# Altium PCB Top.PcbDoc
Units mm, origin at the board's own origin, x right, y up, seen from the top; angles counter-clockwise.
Board outline 98 x 45 mm, 2 copper layers (Top Layer, Bottom Layer); 45 components, 29 nets, 170 pads, 26 vias.
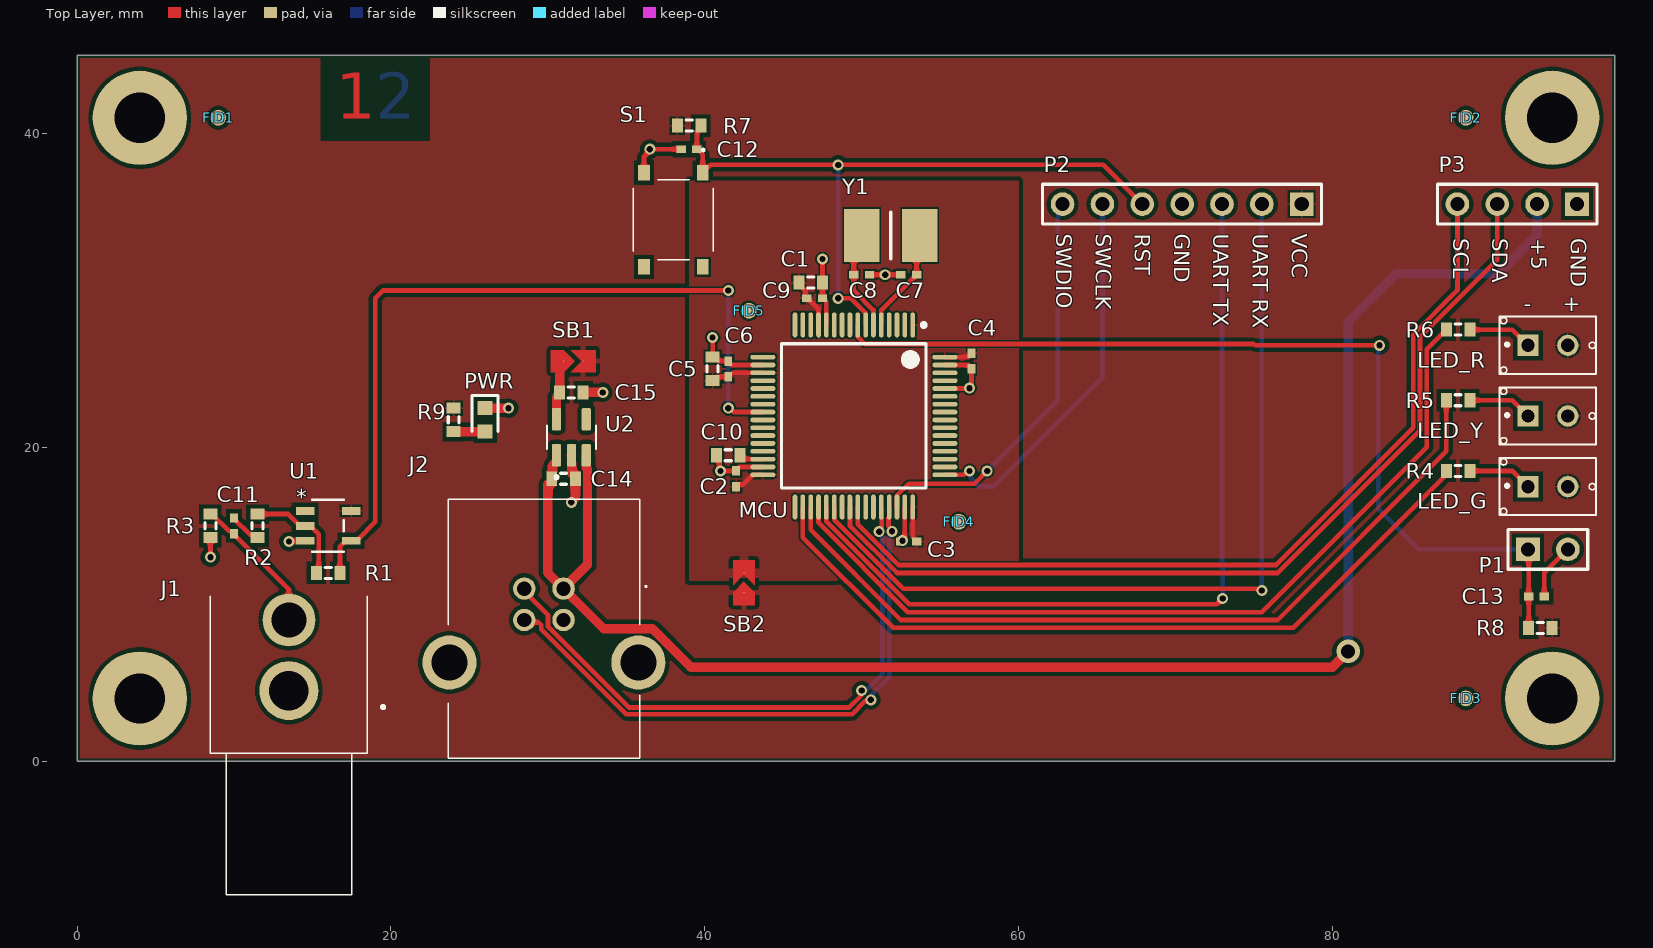
[diagram p0: Top Layer view]
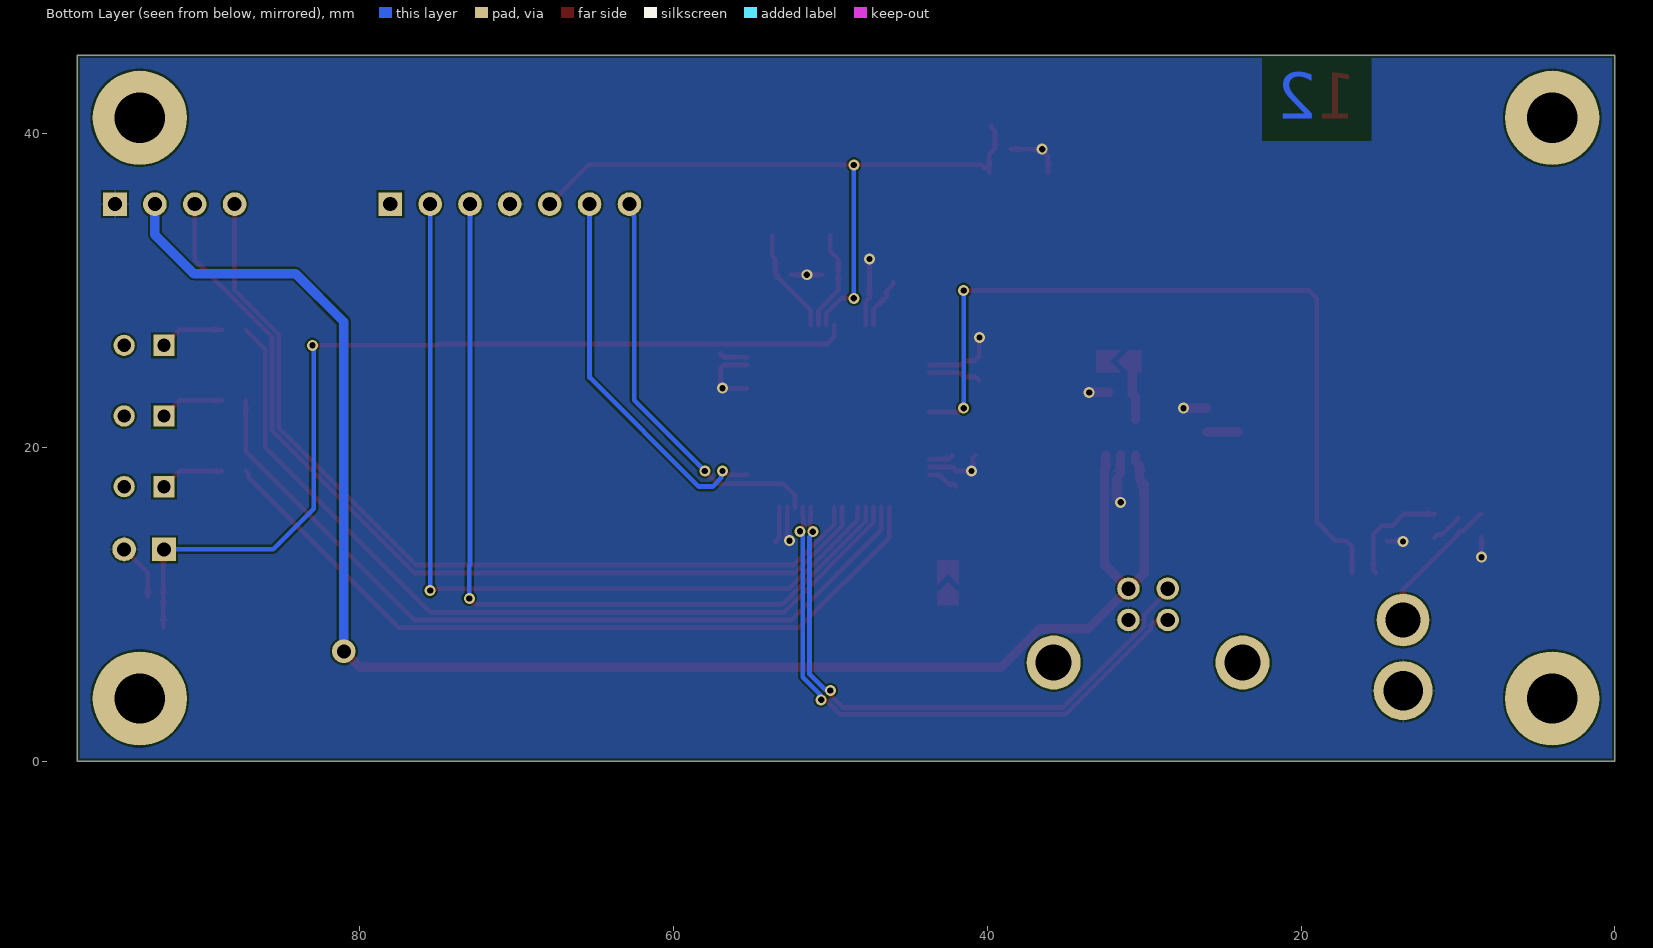
[diagram p1: Bottom Layer view, seen from below]

## Layer stack, top to bottom
Top Solder: solder mask 0.0102, Solder Resist, Dk 3.5
Top Layer: signal copper 0.0356
Dielectric 1: dielectric 0.32, FR-4, Dk 4.8
Bottom Layer: signal copper 0.0356
Bottom Solder: solder mask 0.0102, Solder Resist, Dk 3.5

## Board outline
0,0 98,0 98,45 0,45

## Design rules (kind name [scope] priority, off if disabled: settings)
BoardOutlineClearance [All] p1: gap=0.2 ignorepadtopadclearanceinfootprint=FALSE
Clearance "vccmcu clearance" [InNamedPolygon('VCC') vs InNamedPolygon('VCC_MCU')] p1: gap=0.254 ignorepadtopadclearanceinfootprint=FALSE except(0: Arc-Hole Track-Hole SMDPad-Hole THPad-Hole Via-Hole Fill-Hole Poly-Hole Region-Hole Text-Hole; 0.3: Fill-Fill Fill-Poly Fill-Region Poly-Poly Poly-Region Region-Region)
Clearance Clearance_4 [InNamedPolygon('3V3')] p2: gap=0.254 ignorepadtopadclearanceinfootprint=FALSE except(0: Arc-Hole Track-Hole SMDPad-Hole THPad-Hole Via-Hole Fill-Text Fill-Hole Poly-Text Poly-Hole Region-Text Region-Hole Text-Hole)
Clearance Clearance_3 [InNamedPolygon('VCC')] p3: gap=0.254 ignorepadtopadclearanceinfootprint=FALSE except(0: Arc-Hole Track-Hole SMDPad-Hole THPad-Hole Via-Hole Fill-Text Fill-Hole Poly-Text Poly-Hole Region-Text Region-Hole Text-Hole)
Clearance Clearance_2 [InNamedPolygon('VCC_MCU') vs InNamedPolygon('VCC')] p4: gap=0.254 ignorepadtopadclearanceinfootprint=FALSE except(0: Arc-Hole Track-Hole SMDPad-Hole THPad-Hole Via-Hole Fill-Hole Poly-Hole Region-Hole Text-Hole; 0.4: Fill-Fill Fill-Poly Fill-Region Poly-Poly Poly-Region Region-Region)
Clearance Clearance_1 [InNamedPolygon('VCC_MCU') vs InNamedPolygon('VCC')] p5: gap=0.254 ignorepadtopadclearanceinfootprint=FALSE except(0: Arc-Hole Track-Hole SMDPad-Hole THPad-Hole Via-Hole Fill-Hole Poly-Hole Region-Hole Text-Hole; 0.6: Fill-Fill Fill-Poly Fill-Region Poly-Poly Poly-Region Region-Region)
Clearance [All] p6: gap=0.127 ignorepadtopadclearanceinfootprint=FALSE except(0.25: Arc-Hole Track-Hole SMDPad-Hole THPad-Hole Via-Hole Fill-Hole Poly-Hole Region-Hole Text-Hole)
ComponentClearance [All] p1: gap=0.127 collisioncheckmode=3 verticalgap=0.127 showdistances=TRUE
DiffPairsRouting [All] p1: maxlimit=0.254 minlimit=0.127 mostfreqgap=0.127 toplayer_minwidth=0.127 toplayer_maxwidth=25.4 toplayer_prefwidth=0.127 bottomlayer_minwidth=0.127 bottomlayer_maxwidth=25.4 bottomlayer_prefwidth=0.127 maxuncoupledlength=12.7
Height [All] p1: minheight=0 maxheight=1816.048 prefheight=12.7
HoleSize [All] p1: absolutevalues=TRUE maxlimit=6.3 minlimit=0.3 maxpercent=80.000 minpercent=20.000
HoleToHoleClearance [All] p1: gap=0.25 allowstackedmicrovias=FALSE
MinimumAnnularRing [All] p1: minimumring=0.076
MinimumSolderMaskSliver [All] p1: minsoldermaskwidth=0
PlaneClearance [All] p1: clearance=0.127
PlaneConnect PlaneConnectPowerPads [InPadClass('PowerPads')] p1: planeconnectstyle=Direct reliefexpansion=0.508 reliefentries=4 reliefconductorwidth=0.254 reliefairgap=0.254
PlaneConnect [All] p2: pad.planeconnectstyle=Relief pad.reliefexpansion=0.3 pad.reliefentries=4 pad.reliefconductorwidth=0.127 pad.reliefairgap=0.127 via.planeconnectstyle=Direct via.reliefexpansion=0.3 via.reliefentries=4 via.reliefconductorwidth=0.127 via.reliefairgap=0.127
PolygonConnect Solderbridge_1 [HasFootprint('SOLDER BRIDGE') vs IsNamedPolygon('3V3')] p1: thpad.connectstyle=Relief thpad.reliefconductorwidth=0.254 thpad.reliefentries=4 thpad.polygonreliefangle="90 Angle" thpad.airgapwidth=0.254 smdpad.connectstyle=Relief smdpad.reliefconductorwidth=0.35 smdpad.reliefentries=4 smdpad.polygonreliefangle="90 Angle" smdpad.airgapwidth=0.254 via.connectstyle=Relief via.reliefconductorwidth=0.254 via.reliefentries=4 via.polygonreliefangle="90 Angle" via.airgapwidth=0.254
PolygonConnect PolygonConnect_1 [HasFootprint('SOLDER BRIDGE') vs IsNamedPolygon('VCC')] p2: thpad.connectstyle=Relief thpad.reliefconductorwidth=0.254 thpad.reliefentries=4 thpad.polygonreliefangle="90 Angle" thpad.airgapwidth=0.254 smdpad.connectstyle=Relief smdpad.reliefconductorwidth=0.6 smdpad.reliefentries=4 smdpad.polygonreliefangle="90 Angle" smdpad.airgapwidth=0.254 via.connectstyle=Relief via.reliefconductorwidth=0.254 via.reliefentries=4 via.polygonreliefangle="90 Angle" via.airgapwidth=0.254
PolygonConnect SolderBridge [HasFootprint('SOLDER BRIDGE') vs IsNamedPolygon('VCC_MCU')] p3: thpad.connectstyle=Relief thpad.reliefconductorwidth=0.254 thpad.reliefentries=4 thpad.polygonreliefangle="90 Angle" thpad.airgapwidth=0.254 smdpad.connectstyle=Relief smdpad.reliefconductorwidth=0.6 smdpad.reliefentries=4 smdpad.polygonreliefangle="90 Angle" smdpad.airgapwidth=0.254 via.connectstyle=Relief via.reliefconductorwidth=0.254 via.reliefentries=4 via.polygonreliefangle="90 Angle" via.airgapwidth=0.254
PolygonConnect PolygonConnectPowerPads [All vs (InPadClass('PowerPads'))] p4: connectstyle=Direct reliefconductorwidth=0.254 reliefentries=4 polygonreliefangle="90 Angle" airgapwidth=0.254
PolygonConnect [All] p5: thpad.connectstyle=Relief thpad.reliefconductorwidth=0.127 thpad.reliefentries=4 thpad.polygonreliefangle="90 Angle" thpad.airgapwidth=0.127 smdpad.connectstyle=Relief smdpad.reliefconductorwidth=0.127 smdpad.reliefentries=4 smdpad.polygonreliefangle="90 Angle" smdpad.airgapwidth=0.127 via.connectstyle=Direct via.reliefconductorwidth=0.127 via.reliefentries=4 via.polygonreliefangle="90 Angle" via.airgapwidth=0.127
RoutingVias [All] p1: holewidth=0.3 width=0.6 viastyle="Through Hole" minholewidth=0.3 minwidth=0.6 maxholewidth=0.6 maxwidth=6.6
SilkToSilkClearance [All] p1: silktosilkclearance=0
SilkToSolderMaskClearance [IsPad] p1: minsilkscreentomaskgap=0.127 clearancetoexposedcopper=TRUE
SolderMaskExpansion [All] p1: expansion=0.075 istentingtop=FALSE
Width [All] p1: maxlimit=25.4 minlimit=0.127 preferedwidth=0.127 minimp=50.000000 maximp=50.000000 favimp=50.000000
20 further rules are at their usual default settings.

## Classes and differential pairs
component class U_Power: C14 C15 PWR R9 SB1 U2
component class U_MCU: C1 C2 C3 C4 C5 C6 C7 C8 C9 C10 LED_G LED_R LED_Y MCU R4 R5 R6 SB2 Y1
component class U_Connectivity: C11 C12 C13 J1 J2 P1 P2 P3 R1 R2 R3 R7 R8 S1 U1
differential pair USBD: +USBD_P -USBD_N

## Components (designator, comment, footprint, x,y, rotation, side; value= is the part's Value field where it differs from the comment)
C1 "C19702" J1-0603 46.75,30.5 r180 top value="10 uF"
C2 "C1525" 0402 42,18 r270 top value="100 nF"
C3 "C1525" 0402 53,14 r0 top value="100 nF"
C4 "C1525" 0402 57,25.5 r90 top value="100 nF"
C5 "C15849" J1-0603 40.5,25 r270 top value="1 uF"
C6 "C1525" 0402 41.5,25 r270 top value="100 nF"
C7 "C1562" 0402 53,31 r180 top value="33 pF"
C8 "C1562" 0402 50,31 r0 top value="33 pF"
C9 "C1525" 0402 47,29.5 r180 top value="100 nF"
C10 "C19666" J1-0603 41.5,19.5 r180 top value="4.7 uF"
C11 "C1538" 0402 10,15 r90 top value="4.7 nF"
C12 "C1525" 0402 39,39 r0 top value="100 nF"
C13 "C1525" 0402 93,10.5 r180 top value="100 nF"
C14 "C15849" J1-0603 31,18 r180 top value=1uF
C15 "C15849" J1-0603 31.5,23.5 r180 top value=1uF
FID1 "Comment" FIDUCIAL-1MM 9,41 r0 top
FID2 "Comment" FIDUCIAL-1MM 88.5,41 r0 top
FID3 "Comment" FIDUCIAL-1MM 88.5,4 r0 top
FID4 "Comment" FIDUCIAL-1MM 56.194,15.266 r0 top
FID5 "Comment" FIDUCIAL-1MM 42.815,28.708 r0 top
J1 "RCA" KLPX0848A2B 13.5,4.5 r90 top
J2 "USB B Fem" UJ2BH1TH 29.75,0.19 r0 top
LED_G "fucking led maat hoe moeilijk ist kutprogram" LED_SSL-LX4673GD-LA20 93.73,17.5 r0 top
LED_R "fucking led maat hoe moeilijk ist kutprogram" LED_SSL-LX4673GD-LA20 93.73,26.5 r0 top
LED_Y "fucking led maat hoe moeilijk ist kutprogram" LED_SSL-LX4673GD-LA20 93.73,22 r0 top
MCU "STM32F446RCT6" STM-LQFP64_L 49.5,22 r270 top
P1 "HDR_CLR_BTN" HDR1X2 92.46,13.5 r0 top
P2 "Header DBG" HDR1X7 78.04,35.5 r180 top
P3 "Header I2C" HDR1X4 95.58,35.5 r180 top
PWR "C2286" LEDC1608X70N 26,21.75 r270 top (schematic designator LED_PWR)
R1 "C25803" J1-0603 16,12 r180 top value=100K
R2 "C22962" J1-0603 11.5,15 r270 top value=220
R3 "C4275" J1-0603 8.5,15 r90 top value=75
R4 "C22808" J1-0603 88,18.5 r180 top value=150
R5 "C22808" J1-0603 88,23 r180 top value=150
R6 "C22808" J1-0603 88,27.5 r180 top value=150
R7 "C25804" J1-0603 39,40.5 r0 top value=10k
R8 "C25804" J1-0603 93.25,8.5 r180 top value=10k
R9 "C22828" J1-0603 24,21.75 r270 top value=180
S1 "TS-1187A-B-A-B_1" TS1187ABAB 38,34.5 r270 top
SB1 "Solder Bridge" "SOLDER BRIDGE" 31,25.5 r0 top
SB2 "Solder Bridge" "SOLDER BRIDGE" 42.5,10.75 r90 top
U1 "Inverter1" DBV5-M 16,15 r0 top
U2 "NCP115ASN330T2G" SOT95P275X120-5N 31.5,20.645 r90 top
Y1 "X50328MSB2GI" RESC5032X135N 51.85,33.5 r180 top

## Footprints (in the part's own frame and the unit in brackets; to place one, negate y for a bottom-side part, rotate by r counter-clockwise, add the part's x,y. Pads: shape width x height; smd on the part's side, far side on the other; paste and mask are expansions set on the pad)
0402 [mm] "Chip Capacitor, Body 1.0x0.5mm, IPC High Density"
  rect 0.6x0.5 smd: 1(-0.5,0) 2(0.5,0)
  body extent -0.55,-0.3 0.55,0.3, height 1.3
DBV5-M [mil]
  rect 46.5x20 smd paste+0 mask+0: 1(-57.75,37.4) 2(-57.75,0) 3(-57.75,-37.4) 4(57.75,-37.4) 5(57.75,37.4)
  silkscreen extent -40,-65 40,65, body extent -59,-60 59,60, height 57
FIDUCIAL-1MM [mm] "1MM FIDUCAL MARKER"
  round 1 smd paste+0 mask+0.5: 1(0,0)
HDR1X2 [mm] "Connector; Header; 2 Position"
  rect 1.5x1.5 hole 0.9: 1(0,0)
  round 1.5 hole 0.9: 2(2.54,0)
  silkscreen extent -1.27,-1.27 3.81,1.27
HDR1X4 [mm] "Connector; Header; 4 Position"
  rect 1.5x1.5 hole 0.9: 1(0,0)
  round 1.5 hole 0.9: 2(2.54,0) 3(5.08,0) 4(7.62,0)
  silkscreen extent -1.27,-1.27 8.89,1.27
HDR1X7 [mm] "Connector; Header; 7 Position"
  rect 1.5x1.5 hole 0.9: 1(0,0)
  round 1.5 hole 0.9: 2(2.54,0) 3(5.08,0) 4(7.62,0) 5(10.16,0) 6(12.7,0) 7(15.24,0)
  silkscreen extent -1.27,-1.27 16.51,1.27
J1-0603 [mm] "Chip Resistor, Body 1.6x0.8mm, IPC High Density"
  rect 0.7x0.9 smd: 1(-0.75,0) 2(0.75,0)
  silkscreen extent -0.2,-0.35 0.2,0.35, body extent -0.85,-0.48 0.85,0.48, height 0.9
KLPX0848A2B [mm]
  round 3.765 hole 2.51: 1(0,0)
  round 3.36 hole 2.24: 2(4.5,0)
  silkscreen extent -13,-6.05 6,5, body extent -13.6,-4.99 6,5.01, height 12.95
LED_SSL-LX4673GD-LA20 [mm]
  rect 1.358x1.358 / inner round 1.358 / far side rect 1.358x1.358 hole 0.85: 1(-1.27,0)
  round 1.358 hole 0.85: 2(1.27,0)
  silkscreen extent -3.08,-1.83 3.08,1.83
LEDC1608X70N [mm]
  rect 0.9x0.95 smd: 1(-0.75,0) 2(0.75,0)
  silkscreen extent -1.55,-0.82 0.75,0.82
RESC5032X135N [mm]
  rect 2.25x3.4 smd: 1(-1.85,0) 2(1.85,0)
  silkscreen extent 0,-1.5 0,1.5, body extent -2.5,-1.6 2.5,1.6, height 1.35
"SOLDER BRIDGE" [mil]
  round 1 smd mask+4: 1(0,0) 2(49.21,0)
  Top Layer region: -31.5,-27.56 -31.5,27.56 0,27.56 27.56,0 0,-27.56
  Top Layer region: 17.72,-27.56 80.71,-27.56 80.71,27.56 17.72,27.56 45.28,0
SOT95P275X120-5N [mm]
  rrect25% 1.42x0.58 smd: 1(-1.145,0.95) 2(-1.145,0) 3(-1.145,-0.95) 4(1.145,-0.95) 5(1.145,0.95)
  silkscreen extent -2.64,-1.56 0.75,1.56, body extent -1.34,-1.5 1.41,1.5, height 1.1
STM-LQFP64_L [mm] "QFP, 64-Leads, Body 10x10mm, Pitch 0.5mm, IPC High Density"
  oval 1.6x0.3 smd: 1(-5.8,3.75) 2(-5.8,3.25) 3(-5.8,2.75) 4(-5.8,2.25) 5(-5.8,1.75) 6(-5.8,1.25) 7(-5.8,0.75) 8(-5.8,0.25) 9(-5.8,-0.25) 10(-5.8,-0.75) 11(-5.8,-1.25) 12(-5.8,-1.75) 13(-5.8,-2.25) 14(-5.8,-2.75) 15(-5.8,-3.25) 16(-5.8,-3.75) 33(5.8,-3.75) 34(5.8,-3.25) 35(5.8,-2.75) 36(5.8,-2.25) 37(5.8,-1.75) 38(5.8,-1.25) 39(5.8,-0.75) 40(5.8,-0.25) 41(5.8,0.25) 42(5.8,0.75) 43(5.8,1.25) 44(5.8,1.75) 45(5.8,2.25) 46(5.8,2.75) 47(5.8,3.25) 48(5.8,3.75)
  oval 0.3x1.6 smd: 17(-3.75,-5.8) 18(-3.25,-5.8) 19(-2.75,-5.8) 20(-2.25,-5.8) 21(-1.75,-5.8) 22(-1.25,-5.8) 23(-0.75,-5.8) 24(-0.25,-5.8) 25(0.25,-5.8) 26(0.75,-5.8) 27(1.25,-5.8) 28(1.75,-5.8) 29(2.25,-5.8) 30(2.75,-5.8) 31(3.25,-5.8) 32(3.75,-5.8) 49(3.75,5.8) 50(3.25,5.8) 51(2.75,5.8) 52(2.25,5.8) 53(1.75,5.8) 54(1.25,5.8) 55(0.75,5.8) 56(0.25,5.8) 57(-0.25,5.8) 58(-0.75,5.8) 59(-1.25,5.8) 60(-1.75,5.8) 61(-2.25,5.8) 62(-2.75,5.8) 63(-3.25,5.8) 64(-3.75,5.8)
  silkscreen extent -5.92,-4.6 4.6,4.6, body extent -5,-5 5,5, height 1.6
TS1187ABAB [mm]
  rect 1x0.75 smd: A1(-3,1.875) B1(3,1.875) C1(-3,-1.875) D1(3,-1.875)
  silkscreen extent -4.5,-2.55 2.55,2.55, body extent -3.2,-2.55 3.3,2.55, height 1.5
UJ2BH1TH [mm]
  round 1.431 hole 0.92: 1(1.25,10.81) 2(-1.25,10.81) 3(-1.25,8.81) 4(1.25,8.81)
  round 3.45 hole 2.3: MH1(-6.02,6.1) MH2(6.02,6.1)
  silkscreen extent -6.1,0 6.55,16.5, body extent -7.5,-4.05 7.5,12.4, height 11.03

## Part data
C1 C2 C3 C4 C5 C6 C7 C8 C9 C10 C11 C12 C13 C14 C15: library part Cap, "Capacitor", LatestRevisionDate=17-Jul-2002, LatestRevisionNote="Re-released for DXP Platform.", PackageDescription="Radial Cap, Thru-Hole; 2 Leads; 0.3 in Pin Spacing", PackageReference=RAD-0.3, Published=8-Jun-2000, Publisher="Altium Limited"
J1: library part KLPX-0848A-2-B, "DNP", Mfr_Name="KYCON, INC.", Copyright="Copyright (C) 2023 Ultra Librarian. All rights reserved.", Manufacturer_Part_Number=KLPX-0848A-2-B, RefDes=RefDes, Type=DEV
J2 LED_G LED_R LED_Y SB1 SB2: "DNP"
MCU: library part CMP-0243-00216-1, "ARM Cortex-M4 32-bit MCU+FPU, 256 KB Flash, 128 KB Internal RAM, 50 I/Os, 64-Pin LQFP, -40 to 85 degC, Tray", I/Os (High Current)=50, Operating Frequency(F) (Processor speed) (MHz)=180, Package Description=LQFP64, Package Reference="64-Pin Low-profile Quad Flat Package, Body 10 x 10 mm, Pitch 0.5 mm", Supply Voltage(Vcc) min (V)=1.7, ComponentLink1Description="Manufacturer URL", ComponentLink1URL=http://www.st.com/, ComponentLink2Description=Datasheet, ComponentLink2URL=http://www.st.com/st-web-ui/static/active/en/resource/technical/document/datasheet/DM00141306.pdf, Core="ARM Cortex-M4", D/A Converter=2, DatasheetVersion="Rev. 6", FLASH Size (Prog) (kB)=256, Internal RAM Size (kB)=128, Mounting Technology="Surface Mount", Packing=Tray
P1: library part "Header 2", "Header, 2-Pin DNP", LatestRevisionDate=17-Jul-2002, LatestRevisionNote="Re-released for DXP Platform.", Publisher="Altium Limited"
P2: library part "Header 7", "C492406", LatestRevisionDate=17-Jul-2002, LatestRevisionNote="Re-released for DXP Platform.", Publisher="Altium Limited"
P3: library part "Header 4", "C6332197", LatestRevisionDate=17-Jul-2002, LatestRevisionNote="Re-released for DXP Platform.", Publisher="Altium Limited"
PWR: library part "fucking led maat hoe moeilijk ist kutprogram"
R1 R2 R3 R4 R5 R6 R7 R8 R9: library part Res1, LatestRevisionDate=17-Jul-2002, LatestRevisionNote="Re-released for DXP Platform.", PackageDescription="Axial Device, Thru-Hole; 2 Leads; 0.3 in Pin Spacing", PackageReference=AXIAL-0.3, Published=8-Jun-2000, Publisher="Altium Limited"
S1: "C318884", Manufacturer_Name="XKB Connectivity", Manufacturer_Part_Number=TS-1187A-B-A-B, Datasheet Link=http://www.helloxkb.com/public/images/pdf/TS-1187A-X-X-X.pdf, Height=4.05mm
U1: "C81934", Supplier Part Number 1=296-8487-1-ND, Supplier 1=Digi-Key
U2: "C603505", Mfr_Name=onsemi, Copyright="Copyright (C) 2023 Ultra Librarian. All rights reserved.", Manufacturer_Part_Number=NCP115ASN330T2G, RefDes=RefDes, Type=DEV
Y1: "C115962", Manufacturer_Name="Yangxing Tech", Datasheet Link=https://datasheet.lcsc.com/szlcsc/1903061615_Yangxing-Tech-X50328MSB2GI_C115962.pdf, Height=1.35mm, Manufacturer_Part_Number=X50328MSB2GI

## Free pads (board coordinates)
  round 6 hole 3.2: 2(4,41) 3(4,4) 4(94,4) 5(94,41)

## Via types
v1: diameter 0.7, hole 0.4, Top Layer to Bottom Layer, 25 vias
v2: diameter 1.5, hole 0.9, Top Layer to Bottom Layer, 1 vias

## Nets (pads, with @x,y where several pads share a name; then routed paths per layer and width w, separated by ;. In a path a pad name is that pad's centre, name@x,y a point inside that pad or via, vN(x,y) a via of type N, cw(c..) or ccw(c..) an arc to the next point about the centre after c; other vN are vias at no path point)
+5: C14.2 J2.1 P3.2 U2.1 U2.3 | length 108.1
  Top Layer w0.6: U2.1 30.55,19.1 30.3,18.85 30.3,18.05 C14.2 30.25,17.9 30,17.65 30,12 33.558,8.442 36.661,8.442 39.103,6 80,6 v2(81,7) ; J2.1 32.527,12.527 32.527,18.627 32.46,18.694 32.46,19.49 U2.3
  Bottom Layer w0.6: v2(81,7) 81,28 84.075,31.075 90.575,31.075 93.04,33.54 P3.2
GND: C1.1 C2.1 C3.1 C4.1 C5.1 C6.1 C7.2 C8.2 C9.1 C10.2 C12.1 C13.1 C14.1 C15.1 J1.1 J2.4 MCU.12 MCU.18 MCU.31 MCU.47 MCU.60 MCU.63 P1.2 P2.4 P3.1 PWR.1 R3.1 S1.C1 U1.3 U2.2 | length 37.1
  Top Layer w0.3: v1(8.5,13) R3.1 ; v1(13.5,14) 13.525,14.025 14.508,14.025 U1.3 ; S1.C1 36.125,38.517 36.5,38.892 v1(36.5,39) C12.1 ; v1(40.5,27) C5.1 40.6,25.75 40.85,25.5 C6.1 41.5,25.45 41.7,25.25 MCU.18 ; C10.2 40.923,19.327 40.923,18.577 v1(41,18.5) C2.1 42,18.55 42.2,18.75 MCU.31 ; v1(47.5,32) C1.1 C9.1 47.55,29.5 47.75,29.3 MCU.12 ; C8.2 v1(51.5,31) C7.2 ; C3.1 52.55,14 v1(52.604,14.054) 52.75,14.2 MCU.47 ; MCU.60 56.852,23.75 v1(56.873,23.771) ; MCU.63 56.8,25.25 57,25.05 C4.1 57,23.771 v1@56.979,23.75 ; C13.1 93.5,12 P1.2
  Top Layer w0.6: PWR.1 v1(27.5,22.5) ; v1(31.5,16.5) 31.5,16.527 31.75,16.777 C14.1 ; U2.2 31.51,19.49 C14.1@31.51,18.34 ; C15.1 v1(33.5,23.5)
NetC1_2: C1.2 C2.2 C3.2 C4.2 C5.2 C6.2 C9.2 MCU.1 MCU.13 MCU.19 MCU.32 MCU.48 MCU.64 SB2.2 | length 12.9
  Top Layer w0.3: C5.2 40.75,24.5 C6.2 41.5,24.55 41.6,24.65 41.676,24.65 41.776,24.75 MCU.19 ; C2.2 42,17.55 42.1,17.65 42.45,17.65 43.05,18.25 MCU.32 ; C1.2 46,30.4 46.407,29.993 46.407,29.593 C9.2 46.55,29.5 47.25,28.8 MCU.13 ; MCU.48 53.25,14.276 53.35,14.176 53.35,14.1 53.45,14 C3.2 ; MCU.64 56.8,25.75 57,25.95 C4.2
NetC7_1: C7.1 MCU.5 Y1.1 | length 6.5
  Top Layer w0.3: MCU.5 51.25,28.75 C7.1@53.35,30.85 ; C7.1 53.5,32 53.7,32.2 Y1.1
NetC8_1: C8.1 MCU.6 Y1.2 | length 6.4
  Top Layer w0.3: Y1.2 50,32.5 49.5,32 C8.1 49.5,30 50.75,28.75 MCU.6
NetC10_1: C10.1 MCU.30 | length 1.6
  Top Layer w0.3: C10.1 42.25,19.45 42.45,19.25 MCU.30
NetC11_1: C11.1 J1.2 R3.2 | length 9.5
  Top Layer w0.3: R3.2 8.6,15.75 9.7,14.65 9.9,14.65 10,14.55 C11.1 10,14.45 13.5,10.95 J1.2@13.5,8.5
NetC11_2: C11.2 R2.2 | length 2
  Top Layer w0.3: C11.2 10,15.45 11,14.45 11.3,14.45 R2.2
NetC12_2: C12.2 MCU.7 P2.5 R7.2 S1.A1 | length 44
  Top Layer w0.3: R7.2 39.75,40.4 39.5,40.15 C12.2 39.55,39 39.875,38.675 S1.A1 39.875,37.625 40.1,37.85 40.225,37.85 40.375,38 65.38,38 P2.5 ; v1(48.5,29.5) 49.304,29.5 50.25,28.554 MCU.7
  Bottom Layer w0.3: v1(48.5,29.5) v1(48.5,38)
NetC13_2: C13.2 MCU.8 P1.1 R8.2 | length 60.3
  Top Layer w0.3: MCU.8 49.75,27.046 50.21,26.586 74.989,26.586 75.075,26.5 v1(83,26.5) ; P1.1 92.5,13.46 C13.2 R8.2
  Bottom Layer w0.3: v1(83,26.5) 82.926,26.426 82.926,16.074 85.5,13.5 P1.1
NetC15_2: C15.2 SB1.1 U2.5 | length 3.9
  Top Layer w0.6: U2.5 30.55,23.2 30.75,23.4 C15.2 30.75,25.25 SB1.1
NetLED_G_1: LED_G.1 R4.1 | length 4.1
  Top Layer w0.3: R4.1 91.46,18.5 LED_G.1
NetLED_PWR_2: PWR.2 R9.2 | length 2
  Top Layer w0.6: R9.2 PWR.2
NetLED_R_1: LED_R.1 R6.1 | length 4.1
  Top Layer w0.3: R6.1 91.46,27.5 LED_R.1
NetLED_Y_1: LED_Y.1 R5.1 | length 4.1
  Top Layer w0.3: R5.1 91.46,23 LED_Y.1
NetMCU_24: MCU.24 R1.1 U1.4 | length 51.3
  Top Layer w0.3: R1.1 16.75,13.67 17.13,14.05 17.803,14.05 17.907,14.154 19,15.247 19,29.5 19.5,30 v1(41.5,30) ; v1(41.5,22.5) 41.608,22.5 41.858,22.25 MCU.24
  Bottom Layer w0.3: v1(41.5,22.5) v1(41.5,30)
NetMCU_34: MCU.34 R4.2 | length 49.6
  Top Layer w0.3: MCU.34 46.25,14.25 52,8.5 77.5,8.5 87.05,18.05 87.05,18.3 R4.2
NetMCU_35: MCU.35 R5.2 | length 52
  Top Layer w0.3: MCU.35 46.75,14.75 52.5,9 76.5,9 87.25,19.75 R5.2
NetMCU_36: MCU.36 R6.2 | length 54.5
  Top Layer w0.3: MCU.36 47.25,15.188 52.938,9.5 75.5,9.5 86,20 86,26.25 R6.2
NetMCU_37: MCU.37 P2.3 | length 53.6
  Top Layer w0.3: MCU.37 47.75,15.292 53.042,10 72.624,10 72.997,10.373 v1(73,10.373)
  Bottom Layer w0.3: P2.3 72.96,12.493 73,12.453 v1(73,10.373)
NetMCU_38: MCU.38 P2.2 | length 54.6
  Top Layer w0.3: MCU.38 48.25,15.396 52.646,11 75.124,11 75.175,10.95 75.423,10.95 v1(75.5,10.873)
  Bottom Layer w0.3: v1(75.5,10.873) P2.2
NetMCU_40: MCU.40 P3.3 | length 59
  Top Layer w0.3: MCU.40 49.25,15 52.25,12 76.5,12 85.573,21.073 85.573,27.015 90.5,31.942 P3.3
NetMCU_41: MCU.41 P3.4 | length 56.6
  Top Layer w0.3: MCU.41 49.75,15.104 52.354,12.5 76.396,12.5 85.146,21.25 85.146,27.192 87.96,30.006 P3.4
NetMCU_46: MCU.46 P2.7 | length 26.1
  Top Layer w0.3: MCU.46 52.25,16.954 52.985,17.689 57.189,17.689 v1(58,18.5)
  Bottom Layer w0.3: v1(58,18.5) 62.5,23 62.5,34.724 62.57,34.795 62.57,35.27 P2.7
NetMCU_49: MCU.49 P2.6 | length 24.7
  Top Layer w0.3: MCU.49 56.515,18.25 56.765,18.5 v1(56.873,18.5)
  Bottom Layer w0.3: v1(56.873,18.5) 56.95,18.423 56.95,18.05 57.5,17.5 58.387,17.5 65.34,24.453 P2.6
NetR1_2: R1.2 R2.1 U1.2 | length 7
  Top Layer w0.3: R2.1 13.447,15.75 14.197,15 U1.2 14.87,15 15.401,14.469 15.401,12.151 R1.2
USBD_N: J2.2 MCU.44 | length 38.4
  Top Layer w0.3: J2.2 28.5,10.827 30.008,9.319 30.008,8.589 35.169,3.427 49.21,3.427 49.923,4.141 49.923,4.423 v1(50,4.5) ; v1(51.111,14.63) 51.111,14.738 51.287,14.914 51.287,15.513 51.25,15.55 MCU.44
  Bottom Layer w0.3: v1(50,4.5) 50.077,4.577 50.359,4.577 51.324,5.541 51.324,14.308 51.111,14.521 v1(51.111,14.63)
USBD_P: J2.3 MCU.45 | length 38.1
  Top Layer w0.3: J2.3 28.643,8.856 29.405,8.856 29.581,8.681 29.581,8.412 34.993,3 49.387,3 50.225,3.839 50.508,3.839 v1(50.585,3.915) ; MCU.45 51.75,15.55 51.714,15.513 51.714,14.98 51.937,14.756 v1(51.937,14.648)
  Bottom Layer w0.3: v1(50.585,3.915) 50.661,3.992 50.661,4.275 51.751,5.365 51.751,14.354 51.937,14.54 v1(51.937,14.648)
VCC: LED_G.2 LED_R.2 LED_Y.2 P2.1 R7.1 R8.1 R9.1 SB1.2 SB2.1 U1.5
pads on no net: FID1.1 FID2.1 FID3.1 FID4.1 FID5.1 J2.MH1 J2.MH2 MCU.2 MCU.3 MCU.4 MCU.9 MCU.10 MCU.11 MCU.14 MCU.15 MCU.16 MCU.17 MCU.20 MCU.21 MCU.22 MCU.23 MCU.25 MCU.26 MCU.27 MCU.28 MCU.29 MCU.33 MCU.39 MCU.42 MCU.43 MCU.50 MCU.51 MCU.52 MCU.53 MCU.54 MCU.55 MCU.56 MCU.57 MCU.58 MCU.59 MCU.61 MCU.62 S1.B1 S1.D1 U1.1 U2.4

## Polygon pours and split planes (outlines as drawn)
VCC on Top Layer "3V3" (solid, remove dead copper, pour order 6): 0,45 98,45 98,0 0,0
NetC1_2 on Top Layer "VCC_MCU" (solid, remove dead copper, pour order 4): 39,37 60,37 60,11.5 39,11.5
GND on Bottom Layer "GND" (solid, remove dead copper, pour order 0): 0,45 98,45 98,0 0,0

## Other copper
Top Layer:
  pour cut-out: 22.5,39.5 22.5,45 15.5,45 15.5,39.5
  text "1" at 16.5,40 h5
Bottom Layer:
  pour cut-out: 15.5,39.5 15.5,45 22.5,45 22.5,39.5
  text "2" at 19,40 h5

## Silkscreen, mask and mechanical layers (free items; w line width, h text height)
Top Overlay:
  text "SWDIO" at 62.414,33.613 h1 r270
  text "SWCLK" at 64.914,33.613 h1 r270
  text "RST" at 67.414,33.613 h1 r270
  text "GND" at 69.914,33.613 h1 r270
  text "UART TX" at 72.414,33.613 h1 r270
  text "UART RX" at 74.914,33.613 h1 r270
  text "VCC" at 77.414,33.613 h1 r270
  text "SCL" at 87.68,33.32 h1 r270
  text "SDA" at 90.18,33.32 h1 r270
  text "+5" at 92.68,33.32 h1 r270
  text "GND" at 95.18,33.32 h1 r270
  text "-" at 92.18,28.68 h1
  text "+" at 94.68,28.68 h1

## Text inside footprints (layer, text, board x,y; h text height)
U1: Top Overlay "*" at 13.962,16.331 h1; Mechanical 13 "*" at 15.06,15.366 h1